# EAGLE board tes1-print (EAGLE 6.2), part 1 of 2
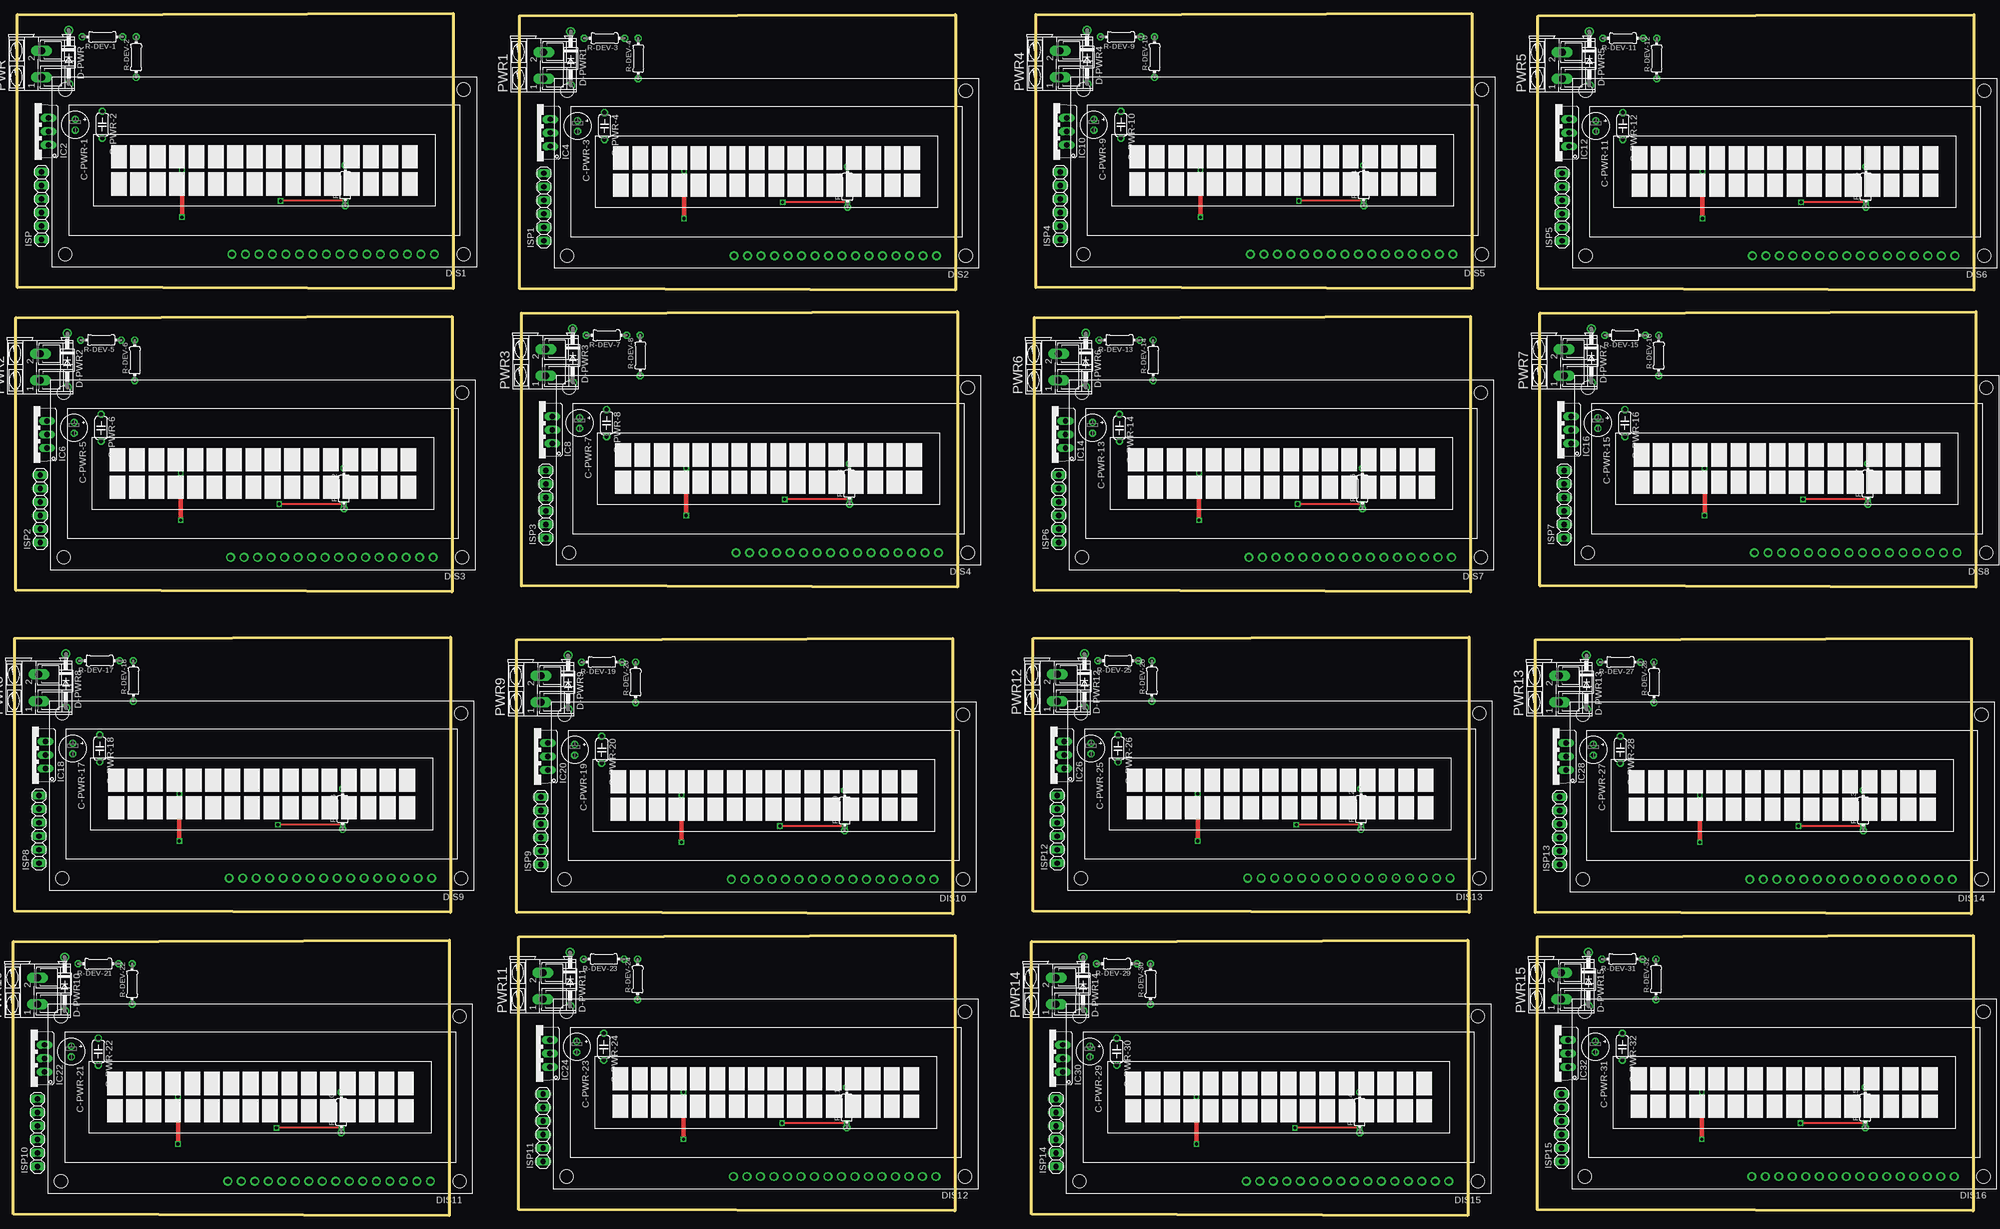
[diagram p0: board, top side]
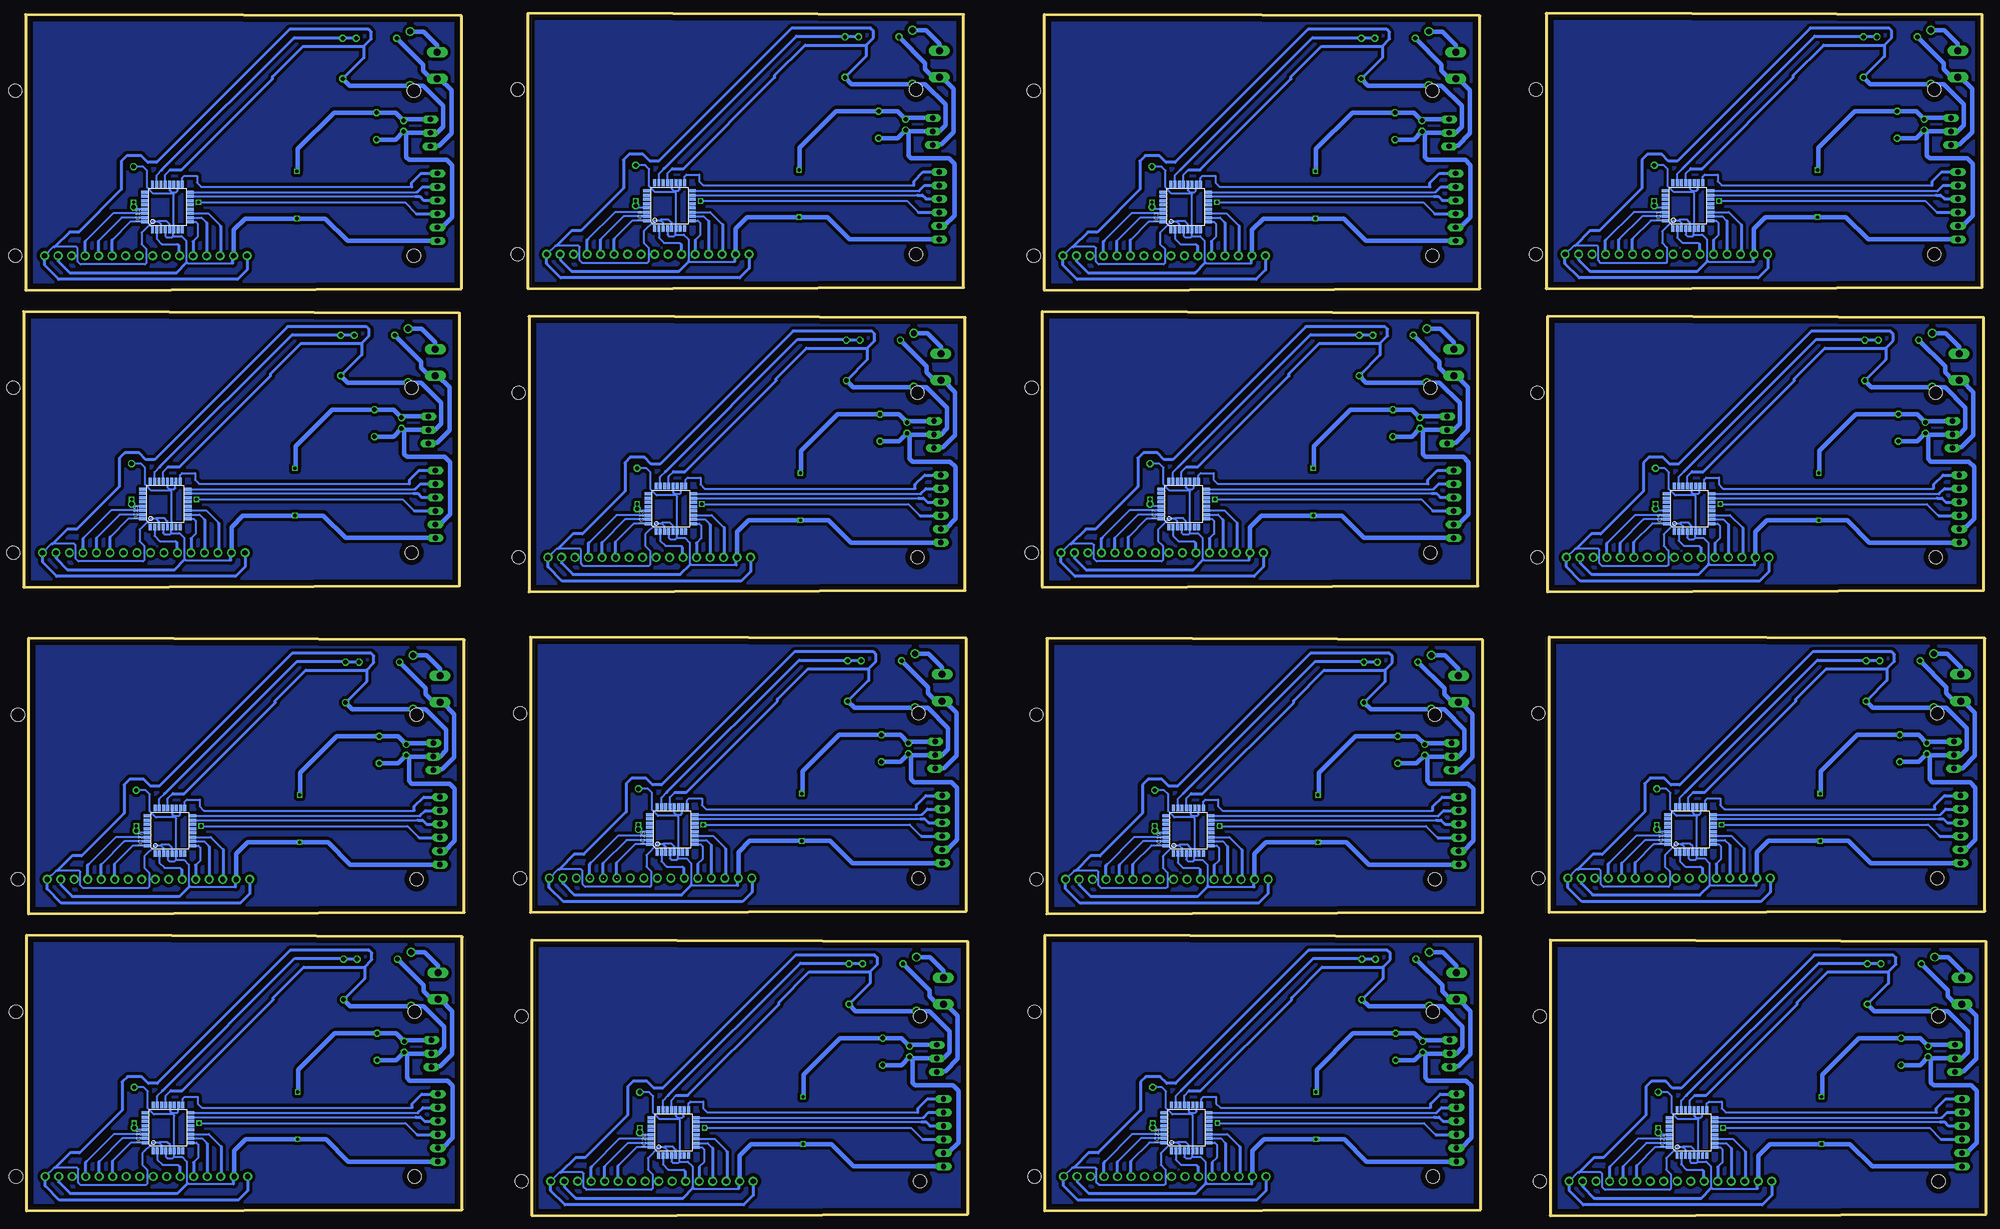
[diagram p1: board, bottom side, seen from below]

Size 369.32 x 226.19 mm. Coordinates in mm from the lower left corner, seen from the top.
Outline: 0.76,225.93 82.8,226.19 82.8,174.37 0.76,174.62 0.76,225.93
Outline: 95.25,225.68 177.29,225.93 177.29,174.12 95.25,174.37 95.25,225.68
Outline: 0.51,168.91 82.55,169.16 82.55,117.35 0.51,117.6 0.51,168.91
Outline: 95.63,169.8 177.67,170.05 177.67,118.24 95.63,118.49 95.63,169.8
Outline: 192.41,225.93 274.45,226.19 274.45,174.37 192.41,174.62 192.41,225.93
Outline: 286.89,225.68 368.94,225.93 368.94,174.12 286.89,174.37 286.89,225.68
Outline: 192.15,168.91 274.19,169.16 274.19,117.35 192.15,117.6 192.15,168.91
Outline: 287.27,169.8 369.32,170.05 369.32,118.24 287.27,118.49 287.27,169.8
Outline: 0.25,108.59 82.3,108.84 82.3,57.02 0.25,57.28 0.25,108.59
Outline: 94.74,108.33 176.78,108.59 176.78,56.77 94.74,57.02 94.74,108.33
Outline: 0,51.56 82.04,51.82 82.04,0 0,0.25 0,51.56
Outline: 95.12,52.45 177.16,52.71 177.16,0.89 95.12,1.14 95.12,52.45
Outline: 191.9,108.59 273.94,108.84 273.94,57.02 191.9,57.28 191.9,108.59
Outline: 286.38,108.33 368.43,108.59 368.43,56.77 286.38,57.02 286.38,108.33
Outline: 191.64,51.56 273.69,51.82 273.69,0 191.64,0.25 191.64,51.56
Outline: 286.77,52.45 368.81,52.71 368.81,0.89 286.77,1.14 286.77,52.45
Copper layers (1*16): Top 0.035mm / dielectric 1.5mm / Bottom 0.035mm
Design rules: minimum track width 10mil, minimum drill 24mil, track to track 8mil, track to pad 8mil, pad to pad 8mil, via to via 8mil, smd to smd 8mil, copper to edge 40mil, drill to drill 8mil, minimum pad ring 10mil, minimum via ring 8mil, stop-mask expansion 4mil, vias tented up to drill 0mil, thermal gap 10mil

## Footprints (pad centres in the part's own frame; a part is rotated, then mirrored left to right if it is on the bottom)
E2-5 = drill 0.813 pad 1.27: + -1.016,0 | drill 0.813 pad 1.27 octagon: - 1.016,0
C050-024X044 = drill 0.813 octagon: 1 -2.54,0; 2 2.54,0
DO41-10 = drill 1.118: A 5.08,0; C -5.08,0
TUXGR_16X2_R2 = drill 1 pad 1.676: 1 -32,15.5; 2 -29.46,15.5; 3 -26.92,15.5; 4 -24.38,15.5; 5 -21.84,15.5; 6 -19.3,15.5; 7 -16.76,15.5; 8 -14.22,15.5; 9 -11.68,15.5; 10 -9.14,15.5; 11 -6.6,15.5; 12 -4.06,15.5; 13 -1.52,15.5; 14 1.02,15.5; 15 3.56,15.5; 16 6.1,15.5 | hole 2.5: -37.5,-15.5; 37.5,-15.5; -37.5,15.5; 37.5,15.5
TQFP32-08 = smd 1.27 x 0.559: 1 -4.293,2.8; 2 -4.293,2; 3 -4.293,1.2; 4 -4.293,0.4; 5 -4.293,-0.4; 6 -4.293,-1.2; 7 -4.293,-2; 8 -4.293,-2.8; 17 4.293,-2.8; 18 4.293,-2; 19 4.293,-1.2; 20 4.293,-0.4; 21 4.293,0.4; 22 4.293,1.2; 23 4.293,2; 24 4.293,2.8 | smd 0.559 x 1.27: 9 -2.8,-4.293; 10 -2,-4.293; 11 -1.2,-4.293; 12 -0.4,-4.293; 13 0.4,-4.293; 14 1.2,-4.293; 15 2,-4.293; 16 2.8,-4.293; 25 2.8,4.293; 26 2,4.293; 27 1.2,4.293; 28 0.4,4.293; 29 -0.4,4.293; 30 -1.2,4.293; 31 -2,4.293; 32 -2.8,4.293
TO220V = drill 1.016 long: 1 -2.54,-2.54; 2 0,-2.54; 3 2.54,-2.54
1X06 = drill 1.016 long: 1 -6.35,0; 2 -3.81,0; 3 -1.27,0; 4 1.27,0; 5 3.81,0; 6 6.35,0
AK300/2 = drill 1.321 long: 1 -2.515,0; 2 2.489,0
0204/7 = drill 0.813 octagon: 1 -3.81,0; 2 3.81,0

## Placement (x,y rotation side)
C-PWR-1  [E2-5]  11.68,205.23 270 top
C-PWR-2  [C050-024X044]  16.76,205.23 270 top
C-PWR-3  [E2-5]  106.17,204.98 270 top
C-PWR-4  [C050-024X044]  111.25,204.98 270 top
C-PWR-5  [E2-5]  11.43,148.21 270 top
C-PWR-6  [C050-024X044]  16.51,148.21 270 top
C-PWR-7  [E2-5]  106.55,149.1 270 top
C-PWR-8  [C050-024X044]  111.63,149.1 270 top
C-PWR-9  [E2-5]  203.33,205.23 270 top
C-PWR-10  [C050-024X044]  208.41,205.23 270 top
C-PWR-11  [E2-5]  297.81,204.98 270 top
C-PWR-12  [C050-024X044]  302.89,204.98 270 top
C-PWR-13  [E2-5]  203.07,148.21 270 top
C-PWR-14  [C050-024X044]  208.15,148.21 270 top
C-PWR-15  [E2-5]  298.2,149.1 270 top
C-PWR-16  [C050-024X044]  303.28,149.1 270 top
C-PWR-17  [E2-5]  11.18,87.88 270 top
C-PWR-18  [C050-024X044]  16.26,87.88 270 top
C-PWR-19  [E2-5]  105.66,87.63 270 top
C-PWR-20  [C050-024X044]  110.74,87.63 270 top
C-PWR-21  [E2-5]  10.92,30.86 270 top
C-PWR-22  [C050-024X044]  16,30.86 270 top
C-PWR-23  [E2-5]  106.04,31.75 270 top
C-PWR-24  [C050-024X044]  111.12,31.75 270 top
C-PWR-25  [E2-5]  202.82,87.88 270 top
C-PWR-26  [C050-024X044]  207.9,87.88 270 top
C-PWR-27  [E2-5]  297.31,87.63 270 top
C-PWR-28  [C050-024X044]  302.39,87.63 270 top
C-PWR-29  [E2-5]  202.56,30.86 270 top
C-PWR-30  [C050-024X044]  207.65,30.86 270 top
C-PWR-31  [E2-5]  297.69,31.75 270 top
C-PWR-32  [C050-024X044]  302.77,31.75 270 top
D-PWR  1N4004  [DO41-10]  10.41,217.93 270 top
D-PWR1  1N4004  [DO41-10]  104.9,217.68 270 top
D-PWR2  1N4004  [DO41-10]  10.16,160.91 270 top
D-PWR3  1N4004  [DO41-10]  105.28,161.8 270 top
D-PWR4  1N4004  [DO41-10]  202.06,217.93 270 top
D-PWR5  1N4004  [DO41-10]  296.55,217.68 270 top
D-PWR6  1N4004  [DO41-10]  201.8,160.91 270 top
D-PWR7  1N4004  [DO41-10]  296.93,161.8 270 top
D-PWR8  1N4004  [DO41-10]  9.91,100.58 270 top
D-PWR9  1N4004  [DO41-10]  104.39,100.33 270 top
D-PWR10  1N4004  [DO41-10]  9.65,43.56 270 top
D-PWR11  1N4004  [DO41-10]  104.78,44.45 270 top
D-PWR12  1N4004  [DO41-10]  201.55,100.58 270 top
D-PWR13  1N4004  [DO41-10]  296.04,100.33 270 top
D-PWR14  1N4004  [DO41-10]  201.29,43.56 270 top
D-PWR15  1N4004  [DO41-10]  296.42,44.45 270 top
DIS1  TUXGR_16X2_R2  [TUXGR_16X2_R2]  47.24,196.34 180 top
DIS2  TUXGR_16X2_R2  [TUXGR_16X2_R2]  141.73,196.09 180 top
DIS3  TUXGR_16X2_R2  [TUXGR_16X2_R2]  46.99,139.32 180 top
DIS4  TUXGR_16X2_R2  [TUXGR_16X2_R2]  142.11,140.21 180 top
DIS5  TUXGR_16X2_R2  [TUXGR_16X2_R2]  238.89,196.34 180 top
DIS6  TUXGR_16X2_R2  [TUXGR_16X2_R2]  333.38,196.09 180 top
DIS7  TUXGR_16X2_R2  [TUXGR_16X2_R2]  238.63,139.32 180 top
DIS8  TUXGR_16X2_R2  [TUXGR_16X2_R2]  333.76,140.21 180 top
DIS9  TUXGR_16X2_R2  [TUXGR_16X2_R2]  46.74,78.99 180 top
DIS10  TUXGR_16X2_R2  [TUXGR_16X2_R2]  141.22,78.74 180 top
DIS11  TUXGR_16X2_R2  [TUXGR_16X2_R2]  46.48,21.97 180 top
DIS12  TUXGR_16X2_R2  [TUXGR_16X2_R2]  141.6,22.86 180 top
DIS13  TUXGR_16X2_R2  [TUXGR_16X2_R2]  238.38,78.99 180 top
DIS14  TUXGR_16X2_R2  [TUXGR_16X2_R2]  332.87,78.74 180 top
DIS15  TUXGR_16X2_R2  [TUXGR_16X2_R2]  238.12,21.97 180 top
DIS16  TUXGR_16X2_R2  [TUXGR_16X2_R2]  333.25,22.86 180 top
IC1  MEGA8-AI  [TQFP32-08]  56.13,189.99 90 bottom
IC2  7805TV  [TO220V]  4.06,203.96 90 top
IC3  MEGA8-AI  [TQFP32-08]  150.62,189.74 90 bottom
IC4  7805TV  [TO220V]  98.55,203.71 90 top
IC5  MEGA8-AI  [TQFP32-08]  55.88,132.97 90 bottom
IC6  7805TV  [TO220V]  3.81,146.94 90 top
IC7  MEGA8-AI  [TQFP32-08]  151,133.86 90 bottom
IC8  7805TV  [TO220V]  98.93,147.83 90 top
IC9  MEGA8-AI  [TQFP32-08]  247.78,189.99 90 bottom
IC10  7805TV  [TO220V]  195.71,203.96 90 top
IC11  MEGA8-AI  [TQFP32-08]  342.26,189.74 90 bottom
IC12  7805TV  [TO220V]  290.19,203.71 90 top
IC13  MEGA8-AI  [TQFP32-08]  247.52,132.97 90 bottom
IC14  7805TV  [TO220V]  195.45,146.94 90 top
IC15  MEGA8-AI  [TQFP32-08]  342.65,133.86 90 bottom
IC16  7805TV  [TO220V]  290.58,147.83 90 top
IC17  MEGA8-AI  [TQFP32-08]  55.63,72.64 90 bottom
IC18  7805TV  [TO220V]  3.56,86.61 90 top
IC19  MEGA8-AI  [TQFP32-08]  150.11,72.39 90 bottom
IC20  7805TV  [TO220V]  98.04,86.36 90 top
IC21  MEGA8-AI  [TQFP32-08]  55.37,15.62 90 bottom
IC22  7805TV  [TO220V]  3.3,29.59 90 top
IC23  MEGA8-AI  [TQFP32-08]  150.5,16.51 90 bottom
IC24  7805TV  [TO220V]  98.43,30.48 90 top
IC25  MEGA8-AI  [TQFP32-08]  247.27,72.64 90 bottom
IC26  7805TV  [TO220V]  195.2,86.61 90 top
IC27  MEGA8-AI  [TQFP32-08]  341.76,72.39 90 bottom
IC28  7805TV  [TO220V]  289.69,86.36 90 top
IC29  MEGA8-AI  [TQFP32-08]  247.01,15.62 90 bottom
IC30  7805TV  [TO220V]  194.94,29.59 90 top
IC31  MEGA8-AI  [TQFP32-08]  342.14,16.51 90 bottom
IC32  7805TV  [TO220V]  290.07,30.48 90 top
ISP  [1X06]  5.33,189.99 90 top
ISP1  [1X06]  99.82,189.74 90 top
ISP2  [1X06]  5.08,132.97 90 top
ISP3  [1X06]  100.2,133.86 90 top
ISP4  [1X06]  196.98,189.99 90 top
ISP5  [1X06]  291.46,189.74 90 top
ISP6  [1X06]  196.72,132.97 90 top
ISP7  [1X06]  291.85,133.86 90 top
ISP8  [1X06]  4.83,72.64 90 top
ISP9  [1X06]  99.31,72.39 90 top
ISP10  [1X06]  4.57,15.62 90 top
ISP11  [1X06]  99.69,16.51 90 top
ISP12  [1X06]  196.47,72.64 90 top
ISP13  [1X06]  290.96,72.39 90 top
ISP14  [1X06]  196.22,15.62 90 top
ISP15  [1X06]  291.34,16.51 90 top
PWR  [AK300/2]  5.33,216.66 90 top
PWR1  [AK300/2]  99.82,216.41 90 top
PWR2  [AK300/2]  5.08,159.64 90 top
PWR3  [AK300/2]  100.2,160.53 90 top
PWR4  [AK300/2]  196.98,216.66 90 top
PWR5  [AK300/2]  291.46,216.41 90 top
PWR6  [AK300/2]  196.72,159.64 90 top
PWR7  [AK300/2]  291.85,160.53 90 top
PWR8  [AK300/2]  4.83,99.31 90 top
PWR9  [AK300/2]  99.31,99.06 90 top
PWR10  [AK300/2]  4.57,42.29 90 top
PWR11  [AK300/2]  99.69,43.18 90 top
PWR12  [AK300/2]  196.47,99.31 90 top
PWR13  [AK300/2]  290.96,99.06 90 top
PWR14  [AK300/2]  196.22,42.29 90 top
PWR15  [AK300/2]  291.34,43.18 90 top
R-DEV-1  [0204/7]  16.76,221.74 180 top
R-DEV-2  [0204/7]  23.11,217.93 90 top
R-DEV-3  [0204/7]  111.25,221.49 180 top
R-DEV-4  [0204/7]  117.6,217.68 90 top
R-DEV-5  [0204/7]  16.51,164.72 180 top
R-DEV-6  [0204/7]  22.86,160.91 90 top
R-DEV-7  [0204/7]  111.63,165.61 180 top
R-DEV-8  [0204/7]  117.98,161.8 90 top
R-DEV-9  [0204/7]  208.41,221.74 180 top
R-DEV-10  [0204/7]  214.76,217.93 90 top
R-DEV-11  [0204/7]  302.89,221.49 180 top
R-DEV-12  [0204/7]  309.25,217.68 90 top
R-DEV-13  [0204/7]  208.15,164.72 180 top
R-DEV-14  [0204/7]  214.5,160.91 90 top
R-DEV-15  [0204/7]  303.28,165.61 180 top
R-DEV-16  [0204/7]  309.63,161.8 90 top
R-DEV-17  [0204/7]  16.26,104.39 180 top
R-DEV-18  [0204/7]  22.61,100.58 90 top
R-DEV-19  [0204/7]  110.74,104.14 180 top
R-DEV-20  [0204/7]  117.09,100.33 90 top
R-DEV-21  [0204/7]  16,47.37 180 top
R-DEV-22  [0204/7]  22.35,43.56 90 top
R-DEV-23  [0204/7]  111.12,48.26 180 top
R-DEV-24  [0204/7]  117.47,44.45 90 top
R-DEV-25  [0204/7]  207.9,104.39 180 top
R-DEV-26  [0204/7]  214.25,100.58 90 top
R-DEV-27  [0204/7]  302.39,104.14 180 top
R-DEV-28  [0204/7]  308.74,100.33 90 top
R-DEV-29  [0204/7]  207.65,47.37 180 top
R-DEV-30  [0204/7]  214,43.56 90 top
R-DEV-31  [0204/7]  302.77,48.26 180 top
R-DEV-32  [0204/7]  309.12,44.45 90 top
R-RST  [0204/7]  62.48,193.8 90 top
R-RST1  [0204/7]  156.97,193.55 90 top
R-RST2  [0204/7]  62.23,136.78 90 top
R-RST3  [0204/7]  157.35,137.67 90 top
R-RST4  [0204/7]  254.13,193.8 90 top
R-RST5  [0204/7]  348.62,193.55 90 top
R-RST6  [0204/7]  253.87,136.78 90 top
R-RST7  [0204/7]  349,137.67 90 top
R-RST8  [0204/7]  61.98,76.45 90 top
R-RST9  [0204/7]  156.46,76.2 90 top
R-RST10  [0204/7]  61.72,19.43 90 top
R-RST11  [0204/7]  156.84,20.32 90 top
R-RST12  [0204/7]  253.62,76.45 90 top
R-RST13  [0204/7]  348.11,76.2 90 top
R-RST14  [0204/7]  253.37,19.43 90 top
R-RST15  [0204/7]  348.49,20.32 90 top

## Library data of the parts
C-PWR-1-C-PWR-32 R-DEV-1-R-DEV-32 R-RST R-RST1-R-RST15 = resistor
D-PWR D-PWR1-D-PWR15 = diode
DIS1-DIS16 = display-lcd; OC_FARNELL: unknown; OC_NEWARK: unknown
IC1 IC3 IC5 IC7 IC9 IC11 IC13 IC15 IC17 IC19 IC21 IC23 IC25 IC27 IC29 IC31 = atmel; MPN: ATMEGA8-16AU; OC_FARNELL: 9171371; OC_NEWARK: 73M8863
IC2 IC4 IC6 IC8 IC10 IC12 IC14 IC16 IC18 IC20 IC22 IC24 IC26 IC28 IC30 IC32 = linear
ISP ISP1-ISP15 = pinhead
PWR PWR1-PWR15 = con-ptr500; OC_FARNELL: unknown; OC_NEWARK: unknown

## Nets
D1: DIS2.11 IC3.2
D2: DIS2.12 IC3.9
D3: DIS2.13 IC3.10
D4: DIS1.11 IC1.2
D5: DIS1.12 IC1.9
D6: DIS1.13 IC1.10
D7: DIS1.14 IC1.11
D8: DIS2.14 IC3.11
D9: DIS3.11 IC5.2
D10: DIS3.12 IC5.9
D11: DIS3.13 IC5.10
D12: DIS3.14 IC5.11
D13: DIS4.11 IC7.2
D14: DIS4.12 IC7.9
D15: DIS4.13 IC7.10
D16: DIS4.14 IC7.11
D17: DIS5.11 IC9.2
D18: DIS5.12 IC9.9
D19: DIS5.13 IC9.10
D20: DIS5.14 IC9.11
D21: DIS6.11 IC11.2
D22: DIS6.12 IC11.9
D23: DIS6.13 IC11.10
D24: DIS6.14 IC11.11
D25: DIS7.11 IC13.2
D26: DIS7.12 IC13.9
D27: DIS7.13 IC13.10
D28: DIS7.14 IC13.11
D29: DIS8.11 IC15.2
D30: DIS8.12 IC15.9
D31: DIS8.13 IC15.10
D32: DIS8.14 IC15.11
D33: DIS9.11 IC17.2
D34: DIS9.12 IC17.9
D35: DIS9.13 IC17.10
D36: DIS9.14 IC17.11
D37: DIS10.11 IC19.2
D38: DIS10.12 IC19.9
D39: DIS10.13 IC19.10
D40: DIS10.14 IC19.11
D41: DIS11.11 IC21.2
D42: DIS11.12 IC21.9
D43: DIS11.13 IC21.10
D44: DIS11.14 IC21.11
D45: DIS12.11 IC23.2
D46: DIS12.12 IC23.9
D47: DIS12.13 IC23.10
D48: DIS12.14 IC23.11
D49: DIS13.11 IC25.2
D50: DIS13.12 IC25.9
D51: DIS13.13 IC25.10
D52: DIS13.14 IC25.11
D53: DIS14.11 IC27.2
D54: DIS14.12 IC27.9
D55: DIS14.13 IC27.10
D56: DIS14.14 IC27.11
D57: DIS15.11 IC29.2
D58: DIS15.12 IC29.9
D59: DIS15.13 IC29.10
D60: DIS15.14 IC29.11
D61: DIS16.11 IC31.2
D62: DIS16.12 IC31.9
D63: DIS16.13 IC31.10
D64: DIS16.14 IC31.11
EN: DIS1.6 IC1.32
EN1: DIS2.6 IC3.32
EN2: DIS3.6 IC5.32
EN3: DIS4.6 IC7.32
EN4: DIS5.6 IC9.32
EN5: DIS6.6 IC11.32
EN6: DIS7.6 IC13.32
EN7: DIS8.6 IC15.32
EN8: DIS9.6 IC17.32
EN9: DIS10.6 IC19.32
EN10: DIS11.6 IC21.32
EN11: DIS12.6 IC23.32
EN12: DIS13.6 IC25.32
EN13: DIS14.6 IC27.32
EN14: DIS15.6 IC29.32
EN15: DIS16.6 IC31.32
GND: C-PWR-1.- C-PWR-2.2 D-PWR.A DIS1.1 DIS1.16 IC1.3 IC1.5 IC1.21 IC2.2 ISP.2 R-DEV-2.1
GND1: C-PWR-3.- C-PWR-4.2 D-PWR1.A DIS2.1 DIS2.16 IC3.3 IC3.5 IC3.21 IC4.2 ISP1.2 R-DEV-4.1
GND2: C-PWR-5.- C-PWR-6.2 D-PWR2.A DIS3.1 DIS3.16 IC5.3 IC5.5 IC5.21 IC6.2 ISP2.2 R-DEV-6.1
GND3: C-PWR-7.- C-PWR-8.2 D-PWR3.A DIS4.1 DIS4.16 IC7.3 IC7.5 IC7.21 IC8.2 ISP3.2 R-DEV-8.1
GND4: C-PWR-9.- C-PWR-10.2 D-PWR4.A DIS5.1 DIS5.16 IC9.3 IC9.5 IC9.21 IC10.2 ISP4.2 R-DEV-10.1
GND5: C-PWR-11.- C-PWR-12.2 D-PWR5.A DIS6.1 DIS6.16 IC11.3 IC11.5 IC11.21 IC12.2 ISP5.2 R-DEV-12.1
GND6: C-PWR-13.- C-PWR-14.2 D-PWR6.A DIS7.1 DIS7.16 IC13.3 IC13.5 IC13.21 IC14.2 ISP6.2 R-DEV-14.1
GND7: C-PWR-15.- C-PWR-16.2 D-PWR7.A DIS8.1 DIS8.16 IC15.3 IC15.5 IC15.21 IC16.2 ISP7.2 R-DEV-16.1
GND8: C-PWR-17.- C-PWR-18.2 D-PWR8.A DIS9.1 DIS9.16 IC17.3 IC17.5 IC17.21 IC18.2 ISP8.2 R-DEV-18.1
GND9: C-PWR-19.- C-PWR-20.2 D-PWR9.A DIS10.1 DIS10.16 IC19.3 IC19.5 IC19.21 IC20.2 ISP9.2 R-DEV-20.1
GND10: C-PWR-21.- C-PWR-22.2 D-PWR10.A DIS11.1 DIS11.16 IC21.3 IC21.5 IC21.21 IC22.2 ISP10.2 R-DEV-22.1
GND11: C-PWR-23.- C-PWR-24.2 D-PWR11.A DIS12.1 DIS12.16 IC23.3 IC23.5 IC23.21 IC24.2 ISP11.2 R-DEV-24.1
GND12: C-PWR-25.- C-PWR-26.2 D-PWR12.A DIS13.1 DIS13.16 IC25.3 IC25.5 IC25.21 IC26.2 ISP12.2 R-DEV-26.1
GND13: C-PWR-27.- C-PWR-28.2 D-PWR13.A DIS14.1 DIS14.16 IC27.3 IC27.5 IC27.21 IC28.2 ISP13.2 R-DEV-28.1
GND14: C-PWR-29.- C-PWR-30.2 D-PWR14.A DIS15.1 DIS15.16 IC29.3 IC29.5 IC29.21 IC30.2 ISP14.2 R-DEV-30.1
GND15: C-PWR-31.- C-PWR-32.2 D-PWR15.A DIS16.1 DIS16.16 IC31.3 IC31.5 IC31.21 IC32.2 ISP15.2 R-DEV-32.1
IN: IC1.23 R-DEV-1.1 R-DEV-2.2
IN1: IC3.23 R-DEV-3.1 R-DEV-4.2
IN2: IC5.23 R-DEV-5.1 R-DEV-6.2
IN3: IC7.23 R-DEV-7.1 R-DEV-8.2
IN4: IC9.23 R-DEV-9.1 R-DEV-10.2
IN5: IC11.23 R-DEV-11.1 R-DEV-12.2
IN6: IC13.23 R-DEV-13.1 R-DEV-14.2
IN7: IC15.23 R-DEV-15.1 R-DEV-16.2
IN8: IC17.23 R-DEV-17.1 R-DEV-18.2
IN9: IC19.23 R-DEV-19.1 R-DEV-20.2
IN10: IC21.23 R-DEV-21.1 R-DEV-22.2
IN11: IC23.23 R-DEV-23.1 R-DEV-24.2
IN12: IC25.23 R-DEV-25.1 R-DEV-26.2
IN13: IC27.23 R-DEV-27.1 R-DEV-28.2
IN14: IC29.23 R-DEV-29.1 R-DEV-30.2
IN15: IC31.23 R-DEV-31.1 R-DEV-32.2
N$2: IC3.17 ISP1.6
N$3: IC3.16 ISP1.5
N$4: IC3.15 ISP1.4
N$6: IC5.17 ISP2.6
N$7: IC5.16 ISP2.5
N$8: IC5.15 ISP2.4
N$10: IC7.17 ISP3.6
N$11: IC7.16 ISP3.5
N$12: IC7.15 ISP3.4
N$14: IC9.17 ISP4.6
N$15: IC1.17 ISP.6
N$16: IC1.16 ISP.5
N$17: IC1.15 ISP.4
N$18: IC9.16 ISP4.5
N$19: IC9.15 ISP4.4
N$21: IC11.17 ISP5.6
N$22: IC11.16 ISP5.5
N$23: IC11.15 ISP5.4
N$25: IC13.17 ISP6.6
N$26: IC13.16 ISP6.5
N$27: IC13.15 ISP6.4
N$29: IC15.17 ISP7.6
N$30: IC15.16 ISP7.5
N$31: IC15.15 ISP7.4
N$33: IC17.17 ISP8.6
N$34: IC17.16 ISP8.5
N$35: IC17.15 ISP8.4
N$37: IC19.17 ISP9.6
N$38: IC19.16 ISP9.5
N$39: IC19.15 ISP9.4
N$41: IC21.17 ISP10.6
N$42: IC21.16 ISP10.5
N$43: IC21.15 ISP10.4
N$45: IC23.17 ISP11.6
N$46: IC23.16 ISP11.5
N$47: IC23.15 ISP11.4
N$49: IC25.17 ISP12.6
N$50: IC25.16 ISP12.5
N$51: IC25.15 ISP12.4
N$53: IC27.17 ISP13.6
N$54: IC27.16 ISP13.5
N$55: IC27.15 ISP13.4
N$57: IC29.17 ISP14.6
N$58: IC29.16 ISP14.5
N$59: IC29.15 ISP14.4
N$61: IC31.17 ISP15.6
N$62: IC31.16 ISP15.5
N$63: IC31.15 ISP15.4
RS: DIS1.4 IC1.30
RS1: DIS2.4 IC3.30
RS2: DIS3.4 IC5.30
RS3: DIS4.4 IC7.30
RS4: DIS5.4 IC9.30
RS5: DIS6.4 IC11.30
RS6: DIS7.4 IC13.30
RS7: DIS8.4 IC15.30
RS8: DIS9.4 IC17.30
RS9: DIS10.4 IC19.30
RS10: DIS11.4 IC21.30
RS11: DIS12.4 IC23.30
RS12: DIS13.4 IC25.30
RS13: DIS14.4 IC27.30
RS14: DIS15.4 IC29.30
RS15: DIS16.4 IC31.30
RST: IC1.29 ISP.3 R-RST.1
RST1: IC3.29 ISP1.3 R-RST1.1
RST2: IC5.29 ISP2.3 R-RST2.1
RST3: IC7.29 ISP3.3 R-RST3.1
RST4: IC9.29 ISP4.3 R-RST4.1
RST5: IC11.29 ISP5.3 R-RST5.1
RST6: IC13.29 ISP6.3 R-RST6.1
RST7: IC15.29 ISP7.3 R-RST7.1
RST8: IC17.29 ISP8.3 R-RST8.1
RST9: IC19.29 ISP9.3 R-RST9.1
RST10: IC21.29 ISP10.3 R-RST10.1
RST11: IC23.29 ISP11.3 R-RST11.1
RST12: IC25.29 ISP12.3 R-RST12.1
RST13: IC27.29 ISP13.3 R-RST13.1
RST14: IC29.29 ISP14.3 R-RST14.1
RST15: IC31.29 ISP15.3 R-RST15.1
RW: DIS1.5 IC1.31
RW1: DIS2.5 IC3.31
RW2: DIS3.5 IC5.31
RW3: DIS4.5 IC7.31
RW4: DIS5.5 IC9.31
RW5: DIS6.5 IC11.31
RW6: DIS7.5 IC13.31
RW7: DIS8.5 IC15.31
RW8: DIS9.5 IC17.31
RW9: DIS10.5 IC19.31
RW10: DIS11.5 IC21.31
RW11: DIS12.5 IC23.31
RW12: DIS13.5 IC25.31
RW13: DIS14.5 IC27.31
RW14: DIS15.5 IC29.31
RW15: DIS16.5 IC31.31
V0: D-PWR.C PWR.2
V1: D-PWR1.C PWR1.2
V2: IC4.1 PWR1.1 R-DEV-3.2
V3: D-PWR2.C PWR2.2
V4: IC6.1 PWR2.1 R-DEV-5.2
V5: D-PWR3.C PWR3.2
V6: IC8.1 PWR3.1 R-DEV-7.2
V7: D-PWR4.C PWR4.2
V8: IC10.1 PWR4.1 R-DEV-9.2
V9: D-PWR5.C PWR5.2
V10: IC12.1 PWR5.1 R-DEV-11.2
V11: D-PWR6.C PWR6.2
V12: IC2.1 PWR.1 R-DEV-1.2
V13: IC14.1 PWR6.1 R-DEV-13.2
V14: D-PWR7.C PWR7.2
V15: IC16.1 PWR7.1 R-DEV-15.2
V16: D-PWR8.C PWR8.2
V17: IC18.1 PWR8.1 R-DEV-17.2
V18: D-PWR9.C PWR9.2
V19: IC20.1 PWR9.1 R-DEV-19.2
V20: D-PWR10.C PWR10.2
V21: IC22.1 PWR10.1 R-DEV-21.2
V22: D-PWR11.C PWR11.2
V23: IC24.1 PWR11.1 R-DEV-23.2
V24: D-PWR12.C PWR12.2
V25: IC26.1 PWR12.1 R-DEV-25.2
V26: D-PWR13.C PWR13.2
V27: IC28.1 PWR13.1 R-DEV-27.2
V28: D-PWR14.C PWR14.2
V29: IC30.1 PWR14.1 R-DEV-29.2
V30: D-PWR15.C PWR15.2
V31: IC32.1 PWR15.1 R-DEV-31.2
VCC: C-PWR-1.+ C-PWR-2.1 DIS1.2 DIS1.15 IC1.4 IC1.6 IC1.18 IC1.20 IC2.3 ISP.1 R-RST.2
VCC1: C-PWR-3.+ C-PWR-4.1 DIS2.2 DIS2.15 IC3.4 IC3.6 IC3.18 IC3.20 IC4.3 ISP1.1 R-RST1.2
VCC2: C-PWR-5.+ C-PWR-6.1 DIS3.2 DIS3.15 IC5.4 IC5.6 IC5.18 IC5.20 IC6.3 ISP2.1 R-RST2.2
VCC3: C-PWR-7.+ C-PWR-8.1 DIS4.2 DIS4.15 IC7.4 IC7.6 IC7.18 IC7.20 IC8.3 ISP3.1 R-RST3.2
VCC4: C-PWR-9.+ C-PWR-10.1 DIS5.2 DIS5.15 IC9.4 IC9.6 IC9.18 IC9.20 IC10.3 ISP4.1 R-RST4.2
VCC5: C-PWR-11.+ C-PWR-12.1 DIS6.2 DIS6.15 IC11.4 IC11.6 IC11.18 IC11.20 IC12.3 ISP5.1 R-RST5.2
VCC6: C-PWR-13.+ C-PWR-14.1 DIS7.2 DIS7.15 IC13.4 IC13.6 IC13.18 IC13.20 IC14.3 ISP6.1 R-RST6.2
VCC7: C-PWR-15.+ C-PWR-16.1 DIS8.2 DIS8.15 IC15.4 IC15.6 IC15.18 IC15.20 IC16.3 ISP7.1 R-RST7.2
VCC8: C-PWR-17.+ C-PWR-18.1 DIS9.2 DIS9.15 IC17.4 IC17.6 IC17.18 IC17.20 IC18.3 ISP8.1 R-RST8.2
VCC9: C-PWR-19.+ C-PWR-20.1 DIS10.2 DIS10.15 IC19.4 IC19.6 IC19.18 IC19.20 IC20.3 ISP9.1 R-RST9.2
VCC10: C-PWR-21.+ C-PWR-22.1 DIS11.2 DIS11.15 IC21.4 IC21.6 IC21.18 IC21.20 IC22.3 ISP10.1 R-RST10.2
VCC11: C-PWR-23.+ C-PWR-24.1 DIS12.2 DIS12.15 IC23.4 IC23.6 IC23.18 IC23.20 IC24.3 ISP11.1 R-RST11.2
VCC12: C-PWR-25.+ C-PWR-26.1 DIS13.2 DIS13.15 IC25.4 IC25.6 IC25.18 IC25.20 IC26.3 ISP12.1 R-RST12.2
VCC13: C-PWR-27.+ C-PWR-28.1 DIS14.2 DIS14.15 IC27.4 IC27.6 IC27.18 IC27.20 IC28.3 ISP13.1 R-RST13.2
VCC14: C-PWR-29.+ C-PWR-30.1 DIS15.2 DIS15.15 IC29.4 IC29.6 IC29.18 IC29.20 IC30.3 ISP14.1 R-RST14.2
VCC15: C-PWR-31.+ C-PWR-32.1 DIS16.2 DIS16.15 IC31.4 IC31.6 IC31.18 IC31.20 IC32.3 ISP15.1 R-RST15.2

## Tracks (layer width: path | path; a pad name or v marks a point on that pad's centre or on a via)
D1
  Bottom 0.406: IC3.2 152.62,183.74 151.64,182.75 148.72,182.75 148.46,182.5
  Bottom 0.61: 148.46,182.5 148.46,180.72 DIS2.11
D2
  Bottom 0.406: IC3.9 145.28,186.94 144.91,186.56 144.91,184.15 145.8,183.26
  Bottom 0.61: 145.8,183.26 DIS2.12
D3
  Bottom 0.406: IC3.10 144.18,187.74 143.26,186.82
  Bottom 0.61: 143.26,186.82 DIS2.13
D4
  Bottom 0.406: IC1.2 58.13,183.99 57.15,183.01 54.23,183.01 53.97,182.75
  Bottom 0.61: 53.97,182.75 53.97,180.97 DIS1.11
D5
  Bottom 0.406: IC1.9 50.79,187.19 50.42,186.82 50.42,184.4 51.31,183.52
  Bottom 0.61: 51.31,183.52 DIS1.12
D6
  Bottom 0.406: IC1.10 49.69,187.99 48.77,187.07
  Bottom 0.61: 48.77,187.07 DIS1.13
D7
  Bottom 0.406: IC1.11 48.46,188.79 46.1,186.44
  Bottom 0.61: 46.1,186.44 46.1,180.97 DIS1.14
D8
  Bottom 0.406: IC3.11 142.94,188.54 140.59,186.18
  Bottom 0.61: 140.59,186.18 140.59,180.71 DIS2.14
D9
  Bottom 0.406: IC5.2 57.88,126.97 56.9,125.98 53.97,125.98 53.72,125.73
  Bottom 0.61: 53.72,125.73 53.72,123.95 DIS3.11
D10
  Bottom 0.406: IC5.9 50.54,130.17 50.17,129.79 50.17,127.38 51.05,126.49
  Bottom 0.61: 51.05,126.49 DIS3.12
D11
  Bottom 0.406: IC5.10 49.44,130.97 48.51,130.05
  Bottom 0.61: 48.51,130.05 DIS3.13
D12
  Bottom 0.406: IC5.11 48.2,131.77 45.85,129.41
  Bottom 0.61: 45.85,129.41 45.85,123.94 DIS3.14
D13
  Bottom 0.406: IC7.2 153,127.86 152.02,126.87 149.1,126.87 148.84,126.62
  Bottom 0.61: 148.84,126.62 148.84,124.84 DIS4.11
D14
  Bottom 0.406: IC7.9 145.66,131.06 145.29,130.68 145.29,128.27 146.18,127.38
  Bottom 0.61: 146.18,127.38 DIS4.12
D15
  Bottom 0.406: IC7.10 144.56,131.86 143.64,130.94
  Bottom 0.61: 143.64,130.94 DIS4.13
D16
  Bottom 0.406: IC7.11 143.33,132.66 140.97,130.3
  Bottom 0.61: 140.97,130.3 140.97,124.83 DIS4.14
D17
  Bottom 0.406: IC9.2 249.78,183.99 248.79,183.01 245.87,183.01 245.62,182.75
  Bottom 0.61: 245.62,182.75 245.62,180.97 DIS5.11
D18
  Bottom 0.406: IC9.9 242.44,187.19 242.06,186.82 242.06,184.4 242.95,183.52
  Bottom 0.61: 242.95,183.52 DIS5.12
D19
  Bottom 0.406: IC9.10 241.33,187.99 240.41,187.07
  Bottom 0.61: 240.41,187.07 DIS5.13
D20
  Bottom 0.406: IC9.11 240.1,188.79 237.74,186.44
  Bottom 0.61: 237.74,186.44 237.74,180.97 DIS5.14
D21
  Bottom 0.406: IC11.2 344.26,183.74 343.28,182.75 340.36,182.75 340.11,182.5
  Bottom 0.61: 340.11,182.5 340.11,180.72 DIS6.11
D22
  Bottom 0.406: IC11.9 336.93,186.94 336.55,186.56 336.55,184.15 337.44,183.26
  Bottom 0.61: 337.44,183.26 DIS6.12
D23
  Bottom 0.406: IC11.10 335.82,187.74 334.9,186.82
  Bottom 0.61: 334.9,186.82 DIS6.13
D24
  Bottom 0.406: IC11.11 334.59,188.54 332.23,186.18
  Bottom 0.61: 332.23,186.18 332.23,180.71 DIS6.14
D25
  Bottom 0.406: IC13.2 249.52,126.97 248.54,125.98 245.62,125.98 245.36,125.73
  Bottom 0.61: 245.36,125.73 245.36,123.95 DIS7.11
D26
  Bottom 0.406: IC13.9 242.18,130.17 241.81,129.79 241.81,127.38 242.7,126.49
  Bottom 0.61: 242.7,126.49 DIS7.12
D27
  Bottom 0.406: IC13.10 241.08,130.97 240.16,130.05
  Bottom 0.61: 240.16,130.05 DIS7.13
D28
  Bottom 0.406: IC13.11 239.85,131.77 237.49,129.41
  Bottom 0.61: 237.49,129.41 237.49,123.94 DIS7.14
D29
  Bottom 0.406: IC15.2 344.65,127.86 343.66,126.87 340.74,126.87 340.49,126.62
  Bottom 0.61: 340.49,126.62 340.49,124.84 DIS8.11
D30
  Bottom 0.406: IC15.9 337.31,131.06 336.93,130.68 336.93,128.27 337.82,127.38
  Bottom 0.61: 337.82,127.38 DIS8.12
D31
  Bottom 0.406: IC15.10 336.2,131.86 335.28,130.94
  Bottom 0.61: 335.28,130.94 DIS8.13
D32
  Bottom 0.406: IC15.11 334.97,132.66 332.61,130.3
  Bottom 0.61: 332.61,130.3 332.61,124.83 DIS8.14
D33
  Bottom 0.406: IC17.2 57.63,66.64 56.64,65.66 53.72,65.66 53.47,65.41
  Bottom 0.61: 53.47,65.41 53.47,63.63 DIS9.11
D34
  Bottom 0.406: IC17.9 50.29,69.84 49.91,69.47 49.91,67.06 50.8,66.17
  Bottom 0.61: 50.8,66.17 DIS9.12
D35
  Bottom 0.406: IC17.10 49.18,70.64 48.26,69.72
  Bottom 0.61: 48.26,69.72 DIS9.13
D36
  Bottom 0.406: IC17.11 47.95,71.44 45.59,69.09
  Bottom 0.61: 45.59,69.09 45.59,63.62 DIS9.14
D37
  Bottom 0.406: IC19.2 152.11,66.39 151.13,65.41 148.21,65.41 147.96,65.15
  Bottom 0.61: 147.96,65.15 147.96,63.37 DIS10.11
D38
  Bottom 0.406: IC19.9 144.77,69.59 144.4,69.22 144.4,66.8 145.29,65.91
  Bottom 0.61: 145.29,65.91 DIS10.12
D39
  Bottom 0.406: IC19.10 143.67,70.39 142.75,69.47
  Bottom 0.61: 142.75,69.47 DIS10.13
D40
  Bottom 0.406: IC19.11 142.44,71.19 140.08,68.83
  Bottom 0.61: 140.08,68.83 140.08,63.36 DIS10.14
D41
  Bottom 0.406: IC21.2 57.37,9.62 56.39,8.64 53.47,8.64 53.21,8.38
  Bottom 0.61: 53.21,8.38 53.21,6.6 DIS11.11
D42
  Bottom 0.406: IC21.9 50.03,12.82 49.66,12.45 49.66,10.03 50.55,9.14
  Bottom 0.61: 50.55,9.14 DIS11.12
D43
  Bottom 0.406: IC21.10 48.93,13.62 48.01,12.7
  Bottom 0.61: 48.01,12.7 DIS11.13
D44
  Bottom 0.406: IC21.11 47.7,14.42 45.34,12.06
  Bottom 0.61: 45.34,12.06 45.34,6.59 DIS11.14
D45
  Bottom 0.406: IC23.2 152.5,10.51 151.51,9.53 148.59,9.53 148.34,9.27
  Bottom 0.61: 148.34,9.27 148.34,7.49 DIS12.11
D46
  Bottom 0.406: IC23.9 145.16,13.71 144.78,13.34 144.78,10.92 145.67,10.03
  Bottom 0.61: 145.67,10.03 DIS12.12
D47
  Bottom 0.406: IC23.10 144.05,14.51 143.13,13.59
  Bottom 0.61: 143.13,13.59 DIS12.13
D48
  Bottom 0.406: IC23.11 142.82,15.31 140.46,12.95
  Bottom 0.61: 140.46,12.95 140.46,7.48 DIS12.14
D49
  Bottom 0.406: IC25.2 249.27,66.64 248.29,65.66 245.36,65.66 245.11,65.41
  Bottom 0.61: 245.11,65.41 245.11,63.63 DIS13.11
D50
  Bottom 0.406: IC25.9 241.93,69.84 241.55,69.47 241.55,67.06 242.44,66.17
  Bottom 0.61: 242.44,66.17 DIS13.12
D51
  Bottom 0.406: IC25.10 240.82,70.64 239.9,69.72
  Bottom 0.61: 239.9,69.72 DIS13.13
D52
  Bottom 0.406: IC25.11 239.59,71.44 237.24,69.09
  Bottom 0.61: 237.24,69.09 237.24,63.62 DIS13.14
D53
  Bottom 0.406: IC27.2 343.76,66.39 342.77,65.41 339.85,65.41 339.6,65.15
  Bottom 0.61: 339.6,65.15 339.6,63.37 DIS14.11
D54
  Bottom 0.406: IC27.9 336.42,69.59 336.04,69.22 336.04,66.8 336.93,65.91
  Bottom 0.61: 336.93,65.91 DIS14.12
D55
  Bottom 0.406: IC27.10 335.31,70.39 334.39,69.47
  Bottom 0.61: 334.39,69.47 DIS14.13
D56
  Bottom 0.406: IC27.11 334.08,71.19 331.72,68.83
  Bottom 0.61: 331.72,68.83 331.72,63.36 DIS14.14
D57
  Bottom 0.406: IC29.2 249.01,9.62 248.03,8.64 245.11,8.64 244.86,8.38
  Bottom 0.61: 244.86,8.38 244.86,6.6 DIS15.11
D58
  Bottom 0.406: IC29.9 241.68,12.82 241.3,12.45 241.3,10.03 242.19,9.14
  Bottom 0.61: 242.19,9.14 DIS15.12
D59
  Bottom 0.406: IC29.10 240.57,13.62 239.65,12.7
  Bottom 0.61: 239.65,12.7 DIS15.13
D60
  Bottom 0.406: IC29.11 239.34,14.42 236.98,12.06
  Bottom 0.61: 236.98,12.06 236.98,6.59 DIS15.14
D61
  Bottom 0.406: IC31.2 344.14,10.51 343.15,9.53 340.23,9.53 339.98,9.27
  Bottom 0.61: 339.98,9.27 339.98,7.49 DIS16.11
D62
  Bottom 0.406: IC31.9 336.8,13.71 336.42,13.34 336.42,10.92 337.31,10.03
  Bottom 0.61: 337.31,10.03 DIS16.12
D63
  Bottom 0.406: IC31.10 335.69,14.51 334.77,13.59
  Bottom 0.61: 334.77,13.59 DIS16.13
D64
  Bottom 0.406: IC31.11 334.46,15.31 332.11,12.95
  Bottom 0.61: 332.11,12.95 332.11,7.48 DIS16.14
EN  (1 unrouted)
  Bottom 0.406: IC1.32 63.12,187.19 66.55,183.77
  Bottom 0.61: DIS1.6 66.55,183.77
EN1  (1 unrouted)
  Bottom 0.406: IC3.32 157.61,186.94 161.04,183.52
  Bottom 0.61: DIS2.6 161.04,183.52
EN2  (1 unrouted)
  Bottom 0.406: IC5.32 62.87,130.17 66.29,126.75
  Bottom 0.61: DIS3.6 66.29,126.75
EN3  (1 unrouted)
  Bottom 0.406: IC7.32 157.99,131.06 161.42,127.64
  Bottom 0.61: DIS4.6 161.42,127.64
EN4  (1 unrouted)
  Bottom 0.406: IC9.32 254.77,187.19 258.19,183.77
  Bottom 0.61: DIS5.6 258.19,183.77
EN5  (1 unrouted)
  Bottom 0.406: IC11.32 349.26,186.94 352.68,183.52
  Bottom 0.61: DIS6.6 352.68,183.52
EN6  (1 unrouted)
  Bottom 0.406: IC13.32 254.51,130.17 257.94,126.75
  Bottom 0.61: DIS7.6 257.94,126.75
EN7  (1 unrouted)
  Bottom 0.406: IC15.32 349.64,131.06 353.06,127.64
  Bottom 0.61: DIS8.6 353.06,127.64
EN8  (1 unrouted)
  Bottom 0.406: IC17.32 62.62,69.84 66.04,66.42
  Bottom 0.61: DIS9.6 66.04,66.42
EN9  (1 unrouted)
  Bottom 0.406: IC19.32 157.1,69.59 160.53,66.17
  Bottom 0.61: DIS10.6 160.53,66.17
EN10  (1 unrouted)
  Bottom 0.406: IC21.32 62.36,12.82 65.79,9.4
  Bottom 0.61: DIS11.6 65.79,9.4
EN11  (1 unrouted)
  Bottom 0.406: IC23.32 157.49,13.71 160.91,10.29
  Bottom 0.61: DIS12.6 160.91,10.29
EN12  (1 unrouted)
  Bottom 0.406: IC25.32 254.26,69.84 257.68,66.42
  Bottom 0.61: DIS13.6 257.68,66.42
EN13  (1 unrouted)
  Bottom 0.406: IC27.32 348.75,69.59 352.17,66.17
  Bottom 0.61: DIS14.6 352.17,66.17
EN14  (1 unrouted)
  Bottom 0.406: IC29.32 254.01,12.82 257.43,9.4
  Bottom 0.61: DIS15.6 257.43,9.4
EN15  (1 unrouted)
  Bottom 0.406: IC31.32 349.13,13.71 352.55,10.29
  Bottom 0.61: DIS16.6 352.55,10.29
GND
  Bottom 0.406: 79.12,178.94 79.25,179.07 | IC1.3 57.33,186.75 57.78,187.2 57.91,187.2 | 57.91,187.2 58.93,187.2 60.96,185.17 60.96,183.01 60.07,182.12 60.07,179.45 60.33,179.2 72.52,179.2 73.03,179.71 73.03,182.25 73.28,182.5 77.34,182.5 77.59,182.5 DIS1.1 | IC1.5 55.73,186.8 56.26,187.33 57.78,187.33 57.91,187.2 | IC1.21 56.53,196.07 55.63,196.98
  Bottom 0.61: DIS1.1 79.25,179.07 76.58,176.4 42.93,176.4 41.14,178.19 DIS1.16 | 55.63,196.98 53.47,196.98 36.32,214.12 36.32,214.5 30.61,220.22 19.18,220.22 | 19.18,220.22 17.78,221.62 17.78,222.88 18.29,223.39 33.15,223.39 58.17,198.37 59.82,198.37 61.09,199.64 63.75,199.64 64.77,198.63 64.77,193.29 72.77,185.29 74.55,185.29 77.34,182.5 | 19.18,220.22 19.18,218.06 R-DEV-2.1
  Bottom 0.813: R-DEV-2.1 21.84,212.85 D-PWR.A 8,212.85 4.19,209.04 4.19,205.11 5.33,203.96 IC2.2 11.43,203.96 C-PWR-1.- | C-PWR-2.2 13.21,202.69 C-PWR-1.- | ISP.2 4.45,186.18 2.54,188.09 2.54,197.87 3.56,198.88 10.67,198.88 11.18,199.39 11.18,203.71 C-PWR-1.-
GND1
  Bottom 0.406: 173.61,178.69 173.74,178.82 | IC3.3 151.82,186.49 152.27,186.94 152.4,186.94 | 152.4,186.94 153.42,186.94 155.45,184.91 155.45,182.75 154.56,181.86 154.56,179.2 154.81,178.94 167,178.94 167.51,179.45 167.51,181.99 167.77,182.25 171.83,182.25 172.07,182.25 DIS2.1 | IC3.5 150.22,186.54 150.75,187.07 152.27,187.07 152.4,186.94 | IC3.21 151.02,195.81 150.11,196.72
  Bottom 0.61: DIS2.1 173.74,178.82 171.07,176.15 137.41,176.15 135.63,177.93 DIS2.16 | 150.11,196.72 147.96,196.72 130.81,213.87 130.81,214.25 125.09,219.96 113.66,219.96 | 113.66,219.96 112.27,221.36 112.27,222.63 112.78,223.14 127.63,223.14 152.65,198.12 154.31,198.12 155.57,199.39 158.24,199.39 159.26,198.37 159.26,193.04 167.26,185.04 169.04,185.04 171.83,182.25 | 113.66,219.96 113.66,217.81 R-DEV-4.1
  Bottom 0.813: R-DEV-4.1 116.33,212.6 D-PWR1.A 102.49,212.6 98.68,208.79 98.68,204.85 99.82,203.71 IC4.2 105.92,203.71 C-PWR-3.- | C-PWR-4.2 107.7,202.44 C-PWR-3.- | ISP1.2 98.93,185.93 97.03,187.83 97.03,197.61 98.04,198.63 105.16,198.63 105.66,199.14 105.66,203.45 C-PWR-3.-
GND2
  Bottom 0.406: 78.87,121.92 78.99,122.05 | IC5.3 57.08,129.72 57.53,130.18 57.66,130.18 | 57.66,130.18 58.67,130.18 60.71,128.14 60.71,125.98 59.82,125.1 59.82,122.43 60.07,122.17 72.26,122.17 72.77,122.68 72.77,125.22 73.03,125.48 77.09,125.48 77.33,125.48 DIS3.1 | IC5.5 55.48,129.78 56.01,130.3 57.53,130.3 57.66,130.18 | IC5.21 56.28,139.05 55.37,139.95
  Bottom 0.61: DIS3.1 78.99,122.05 76.33,119.38 42.67,119.38 40.89,121.16 DIS3.16 | 55.37,139.95 53.21,139.95 36.07,157.1 36.07,157.48 30.35,163.2 18.92,163.2 | 18.92,163.2 17.53,164.59 17.53,165.86 18.03,166.37 32.89,166.37 57.91,141.35 59.56,141.35 60.83,142.62 63.5,142.62 64.52,141.61 64.52,136.27 72.52,128.27 74.3,128.27 77.09,125.48 | 18.92,163.2 18.92,161.04 R-DEV-6.1
  Bottom 0.813: R-DEV-6.1 21.59,155.83 D-PWR2.A 7.75,155.83 3.94,152.02 3.94,148.08 5.08,146.94 IC6.2 11.18,146.94 C-PWR-5.- | C-PWR-6.2 12.95,145.67 C-PWR-5.- | ISP2.2 4.19,129.16 2.29,131.06 2.29,140.84 3.3,141.86 10.41,141.86 10.92,142.37 10.92,146.69 C-PWR-5.-
GND3
  Bottom 0.406: 173.99,122.81 174.12,122.94 | IC7.3 152.2,130.61 152.65,131.06 152.78,131.06 | 152.78,131.06 153.8,131.06 155.83,129.03 155.83,126.87 154.94,125.98 154.94,123.32 155.19,123.06 167.39,123.06 167.89,123.57 167.89,126.11 168.15,126.37 172.21,126.37 172.46,126.37 DIS4.1 | IC7.5 150.6,130.66 151.13,131.19 152.65,131.19 152.78,131.06 | IC7.21 151.4,139.94 150.5,140.84
  Bottom 0.61: DIS4.1 174.12,122.94 171.45,120.27 137.79,120.27 136.01,122.05 DIS4.16 | 150.5,140.84 148.34,140.84 131.19,157.99 131.19,158.37 125.48,164.08 114.05,164.08 | 114.05,164.08 112.65,165.48 112.65,166.75 113.16,167.26 128.02,167.26 153.03,142.24 154.69,142.24 155.96,143.51 158.62,143.51 159.64,142.49 159.64,137.16 167.64,129.16 169.42,129.16 172.21,126.37 | 114.05,164.08 114.05,161.93 R-DEV-8.1
  Bottom 0.813: R-DEV-8.1 116.71,156.72 D-PWR3.A 102.87,156.72 99.06,152.91 99.06,148.97 100.2,147.83 IC8.2 106.3,147.83 C-PWR-7.- | C-PWR-8.2 108.08,146.56 C-PWR-7.- | ISP3.2 99.31,130.05 97.41,131.95 97.41,141.73 98.43,142.75 105.54,142.75 106.04,143.26 106.04,147.57 C-PWR-7.-
GND4
  Bottom 0.406: 270.76,178.94 270.89,179.07 | IC9.3 248.98,186.75 249.43,187.2 249.56,187.2 | 249.56,187.2 250.57,187.2 252.6,185.17 252.6,183.01 251.71,182.12 251.71,179.45 251.97,179.2 264.16,179.2 264.67,179.71 264.67,182.25 264.92,182.5 268.99,182.5 269.23,182.5 DIS5.1 | IC9.5 247.38,186.8 247.9,187.33 249.43,187.33 249.56,187.2 | IC9.21 248.18,196.07 247.27,196.98
  Bottom 0.61: DIS5.1 270.89,179.07 268.22,176.4 234.57,176.4 232.79,178.19 DIS5.16 | 247.27,196.98 245.11,196.98 227.96,214.12 227.96,214.5 222.25,220.22 210.82,220.22 | 210.82,220.22 209.42,221.62 209.42,222.88 209.93,223.39 224.79,223.39 249.81,198.37 251.46,198.37 252.73,199.64 255.4,199.64 256.41,198.63 256.41,193.29 264.41,185.29 266.19,185.29 268.99,182.5 | 210.82,220.22 210.82,218.06 R-DEV-10.1
  Bottom 0.813: R-DEV-10.1 213.49,212.85 D-PWR4.A 199.64,212.85 195.83,209.04 195.83,205.11 196.98,203.96 IC10.2 203.07,203.96 C-PWR-9.- | C-PWR-10.2 204.85,202.69 C-PWR-9.- | ISP4.2 196.09,186.18 194.18,188.09 194.18,197.87 195.2,198.88 202.31,198.88 202.82,199.39 202.82,203.71 C-PWR-9.-
GND5
  Bottom 0.406: 365.25,178.69 365.38,178.82 | IC11.3 343.46,186.49 343.92,186.94 344.04,186.94 | 344.04,186.94 345.06,186.94 347.09,184.91 347.09,182.75 346.2,181.86 346.2,179.2 346.46,178.94 358.65,178.94 359.16,179.45 359.16,181.99 359.41,182.25 363.47,182.25 363.72,182.25 DIS6.1 | IC11.5 341.87,186.54 342.39,187.07 343.92,187.07 344.04,186.94 | IC11.21 342.67,195.81 341.76,196.72
  Bottom 0.61: DIS6.1 365.38,178.82 362.71,176.15 329.06,176.15 327.27,177.93 DIS6.16 | 341.76,196.72 339.6,196.72 322.45,213.87 322.45,214.25 316.74,219.96 305.31,219.96 | 305.31,219.96 303.91,221.36 303.91,222.63 304.42,223.14 319.28,223.14 344.3,198.12 345.95,198.12 347.22,199.39 349.88,199.39 350.9,198.37 350.9,193.04 358.9,185.04 360.68,185.04 363.47,182.25 | 305.31,219.96 305.31,217.81 R-DEV-12.1
  Bottom 0.813: R-DEV-12.1 307.98,212.6 D-PWR5.A 294.13,212.6 290.32,208.79 290.32,204.85 291.46,203.71 IC12.2 297.56,203.71 C-PWR-11.- | C-PWR-12.2 299.34,202.44 C-PWR-11.- | ISP5.2 290.58,185.93 288.67,187.83 288.67,197.61 289.69,198.63 296.8,198.63 297.31,199.14 297.31,203.45 C-PWR-11.-
GND6
  Bottom 0.406: 270.51,121.92 270.64,122.05 | IC13.3 248.72,129.72 249.17,130.18 249.3,130.18 | 249.3,130.18 250.32,130.18 252.35,128.14 252.35,125.98 251.46,125.1 251.46,122.43 251.71,122.17 263.91,122.17 264.41,122.68 264.41,125.22 264.67,125.48 268.73,125.48 268.98,125.48 DIS7.1 | IC13.5 247.12,129.78 247.65,130.3 249.17,130.3 249.3,130.18 | IC13.21 247.92,139.05 247.01,139.95
  Bottom 0.61: DIS7.1 270.64,122.05 267.97,119.38 234.31,119.38 232.53,121.16 DIS7.16 | 247.01,139.95 244.86,139.95 227.71,157.1 227.71,157.48 222,163.2 210.57,163.2 | 210.57,163.2 209.17,164.59 209.17,165.86 209.68,166.37 224.54,166.37 249.56,141.35 251.21,141.35 252.48,142.62 255.14,142.62 256.16,141.61 256.16,136.27 264.16,128.27 265.94,128.27 268.73,125.48 | 210.57,163.2 210.57,161.04 R-DEV-14.1
  Bottom 0.813: R-DEV-14.1 213.23,155.83 D-PWR6.A 199.39,155.83 195.58,152.02 195.58,148.08 196.72,146.94 IC14.2 202.82,146.94 C-PWR-13.- | C-PWR-14.2 204.6,145.67 C-PWR-13.- | ISP6.2 195.83,129.16 193.93,131.06 193.93,140.84 194.94,141.86 202.06,141.86 202.56,142.37 202.56,146.69 C-PWR-13.-
GND7
  Bottom 0.406: 365.63,122.81 365.76,122.94 | IC15.3 343.85,130.61 344.3,131.06 344.42,131.06 | 344.42,131.06 345.44,131.06 347.47,129.03 347.47,126.87 346.58,125.98 346.58,123.32 346.84,123.06 359.03,123.06 359.54,123.57 359.54,126.11 359.79,126.37 363.86,126.37 364.1,126.37 DIS8.1 | IC15.5 342.25,130.66 342.77,131.19 344.3,131.19 344.42,131.06 | IC15.21 343.05,139.94 342.14,140.84
  Bottom 0.61: DIS8.1 365.76,122.94 363.09,120.27 329.44,120.27 327.66,122.05 DIS8.16 | 342.14,140.84 339.98,140.84 322.83,157.99 322.83,158.37 317.12,164.08 305.69,164.08 | 305.69,164.08 304.29,165.48 304.29,166.75 304.8,167.26 319.66,167.26 344.68,142.24 346.33,142.24 347.6,143.51 350.27,143.51 351.28,142.49 351.28,137.16 359.28,129.16 361.06,129.16 363.86,126.37 | 305.69,164.08 305.69,161.93 R-DEV-16.1
  Bottom 0.813: R-DEV-16.1 308.36,156.72 D-PWR7.A 294.51,156.72 290.7,152.91 290.7,148.97 291.85,147.83 IC16.2 297.94,147.83 C-PWR-15.- | C-PWR-16.2 299.72,146.56 C-PWR-15.- | ISP7.2 290.96,130.05 289.05,131.95 289.05,141.73 290.07,142.75 297.18,142.75 297.69,143.26 297.69,147.57 C-PWR-15.-
GND8
  Bottom 0.406: 78.61,61.6 78.74,61.72 | IC17.3 56.83,69.4 57.28,69.85 57.4,69.85 | 57.4,69.85 58.42,69.85 60.45,67.82 60.45,65.66 59.56,64.77 59.56,62.1 59.82,61.85 72.01,61.85 72.52,62.36 72.52,64.9 72.77,65.15 76.84,65.15 77.08,65.15 DIS9.1 | IC17.5 55.23,69.45 55.75,69.98 57.28,69.98 57.4,69.85 | IC17.21 56.03,78.72 55.12,79.63
  Bottom 0.61: DIS9.1 78.74,61.72 76.07,59.06 42.42,59.06 40.64,60.84 DIS9.16 | 55.12,79.63 52.96,79.63 35.81,96.77 35.81,97.16 30.1,102.87 18.67,102.87 | 18.67,102.87 17.27,104.27 17.27,105.54 17.78,106.05 32.64,106.05 57.66,81.03 59.31,81.03 60.58,82.3 63.25,82.3 64.26,81.28 64.26,75.95 72.26,67.95 74.04,67.95 76.84,65.15 | 18.67,102.87 18.67,100.71 R-DEV-18.1
  Bottom 0.813: R-DEV-18.1 21.34,95.5 D-PWR8.A 7.49,95.5 3.68,91.69 3.68,87.76 4.83,86.61 IC18.2 10.92,86.61 C-PWR-17.- | C-PWR-18.2 12.7,85.34 C-PWR-17.- | ISP8.2 3.94,68.83 2.03,70.74 2.03,80.52 3.05,81.53 10.16,81.53 10.67,82.04 10.67,86.36 C-PWR-17.-
GND9
  Bottom 0.406: 173.1,61.34 173.23,61.47 | IC19.3 151.31,69.15 151.77,69.6 151.89,69.6 | 151.89,69.6 152.91,69.6 154.94,67.56 154.94,65.41 154.05,64.52 154.05,61.85 154.31,61.6 166.5,61.6 167,62.1 167,64.64 167.26,64.9 171.32,64.9 171.57,64.9 DIS10.1 | IC19.5 149.71,69.2 150.24,69.72 151.77,69.72 151.89,69.6 | IC19.21 150.51,78.47 149.61,79.38
  Bottom 0.61: DIS10.1 173.23,61.47 170.56,58.8 136.91,58.8 135.12,60.58 DIS10.16 | 149.61,79.38 147.45,79.38 130.3,96.52 130.3,96.9 124.59,102.62 113.16,102.62 | 113.16,102.62 111.76,104.01 111.76,105.28 112.27,105.79 127.13,105.79 152.15,80.77 153.8,80.77 155.07,82.04 157.73,82.04 158.75,81.03 158.75,75.69 166.75,67.69 168.53,67.69 171.32,64.9 | 113.16,102.62 113.16,100.46 R-DEV-20.1
  Bottom 0.813: R-DEV-20.1 115.82,95.25 D-PWR9.A 101.98,95.25 98.17,91.44 98.17,87.5 99.31,86.36 IC20.2 105.41,86.36 C-PWR-19.- | C-PWR-20.2 107.19,85.09 C-PWR-19.- | ISP9.2 98.43,68.58 96.52,70.49 96.52,80.26 97.54,81.28 104.65,81.28 105.16,81.79 105.16,86.11 C-PWR-19.-
GND10
  Bottom 0.406: 78.36,4.57 78.49,4.7 | IC21.3 56.57,12.38 57.02,12.83 57.15,12.83 | 57.15,12.83 58.17,12.83 60.2,10.8 60.2,8.64 59.31,7.75 59.31,5.08 59.56,4.83 71.75,4.83 72.26,5.33 72.26,7.87 72.52,8.13 76.58,8.13 76.83,8.13 DIS11.1 | IC21.5 54.97,12.43 55.5,12.95 57.02,12.95 57.15,12.83 | IC21.21 55.77,21.7 54.86,22.61
  Bottom 0.61: DIS11.1 78.49,4.7 75.82,2.03 42.16,2.03 40.38,3.81 DIS11.16 | 54.86,22.61 52.7,22.61 35.56,39.75 35.56,40.13 29.84,45.85 18.41,45.85 | 18.41,45.85 17.02,47.24 17.02,48.51 17.53,49.02 32.38,49.02 57.4,24 59.06,24 60.33,25.27 62.99,25.27 64.01,24.26 64.01,18.92 72.01,10.92 73.79,10.92 76.58,8.13 | 18.41,45.85 18.41,43.69 R-DEV-22.1
  Bottom 0.813: R-DEV-22.1 21.08,38.48 D-PWR10.A 7.24,38.48 3.43,34.67 3.43,30.73 4.57,29.59 IC22.2 10.67,29.59 C-PWR-21.- | C-PWR-22.2 12.45,28.32 C-PWR-21.- | ISP10.2 3.68,11.81 1.78,13.72 1.78,23.5 2.79,24.51 9.91,24.51 10.41,25.02 10.41,29.34 C-PWR-21.-
GND11
  Bottom 0.406: 173.48,5.46 173.61,5.59 | IC23.3 151.69,13.27 152.15,13.72 152.27,13.72 | 152.27,13.72 153.29,13.72 155.32,11.68 155.32,9.53 154.43,8.64 154.43,5.97 154.69,5.72 166.88,5.72 167.39,6.22 167.39,8.76 167.64,9.02 171.7,9.02 171.95,9.02 DIS12.1 | IC23.5 150.09,13.32 150.62,13.84 152.15,13.84 152.27,13.72 | IC23.21 150.9,22.59 149.99,23.5
  Bottom 0.61: DIS12.1 173.61,5.59 170.94,2.92 137.29,2.92 135.5,4.7 DIS12.16 | 149.99,23.5 147.83,23.5 130.68,40.64 130.68,41.02 124.97,46.74 113.54,46.74 | 113.54,46.74 112.14,48.13 112.14,49.4 112.65,49.91 127.51,49.91 152.53,24.89 154.18,24.89 155.45,26.16 158.12,26.16 159.13,25.15 159.13,19.81 167.13,11.81 168.91,11.81 171.7,9.02 | 113.54,46.74 113.54,44.58 R-DEV-24.1
  Bottom 0.813: R-DEV-24.1 116.21,39.37 D-PWR11.A 102.36,39.37 98.55,35.56 98.55,31.62 99.69,30.48 IC24.2 105.79,30.48 C-PWR-23.- | C-PWR-24.2 107.57,29.21 C-PWR-23.- | ISP11.2 98.81,12.7 96.9,14.61 96.9,24.38 97.92,25.4 105.03,25.4 105.54,25.91 105.54,30.23 C-PWR-23.-
GND12
  Bottom 0.406: 270.26,61.6 270.38,61.72 | IC25.3 248.47,69.4 248.92,69.85 249.05,69.85 | 249.05,69.85 250.06,69.85 252.1,67.82 252.1,65.66 251.21,64.77 251.21,62.1 251.46,61.85 263.65,61.85 264.16,62.36 264.16,64.9 264.41,65.15 268.48,65.15 268.72,65.15 DIS13.1 | IC25.5 246.87,69.45 247.4,69.98 248.92,69.98 249.05,69.85 | IC25.21 247.67,78.72 246.76,79.63
  Bottom 0.61: DIS13.1 270.38,61.72 267.72,59.06 234.06,59.06 232.28,60.84 DIS13.16 | 246.76,79.63 244.6,79.63 227.46,96.77 227.46,97.16 221.74,102.87 210.31,102.87 | 210.31,102.87 208.91,104.27 208.91,105.54 209.42,106.05 224.28,106.05 249.3,81.03 250.95,81.03 252.22,82.3 254.89,82.3 255.9,81.28 255.9,75.95 263.91,67.95 265.68,67.95 268.48,65.15 | 210.31,102.87 210.31,100.71 R-DEV-26.1
  Bottom 0.813: R-DEV-26.1 212.98,95.5 D-PWR12.A 199.14,95.5 195.33,91.69 195.33,87.76 196.47,86.61 IC26.2 202.56,86.61 C-PWR-25.- | C-PWR-26.2 204.34,85.34 C-PWR-25.- | ISP12.2 195.58,68.83 193.68,70.74 193.68,80.52 194.69,81.53 201.8,81.53 202.31,82.04 202.31,86.36 C-PWR-25.-
GND13
  Bottom 0.406: 364.74,61.34 364.87,61.47 | IC27.3 342.96,69.15 343.41,69.6 343.54,69.6 | 343.54,69.6 344.55,69.6 346.58,67.56 346.58,65.41 345.69,64.52 345.69,61.85 345.95,61.6 358.14,61.6 358.65,62.1 358.65,64.64 358.9,64.9 362.97,64.9 363.21,64.9 DIS14.1 | IC27.5 341.36,69.2 341.88,69.72 343.41,69.72 343.54,69.6 | IC27.21 342.16,78.47 341.25,79.38
  Bottom 0.61: DIS14.1 364.87,61.47 362.2,58.8 328.55,58.8 326.77,60.58 DIS14.16 | 341.25,79.38 339.09,79.38 321.94,96.52 321.94,96.9 316.23,102.62 304.8,102.62 | 304.8,102.62 303.4,104.01 303.4,105.28 303.91,105.79 318.77,105.79 343.79,80.77 345.44,80.77 346.71,82.04 349.38,82.04 350.39,81.03 350.39,75.69 358.39,67.69 360.17,67.69 362.97,64.9 | 304.8,102.62 304.8,100.46 R-DEV-28.1
  Bottom 0.813: R-DEV-28.1 307.47,95.25 D-PWR13.A 293.62,95.25 289.81,91.44 289.81,87.5 290.96,86.36 IC28.2 297.05,86.36 C-PWR-27.- | C-PWR-28.2 298.83,85.09 C-PWR-27.- | ISP13.2 290.07,68.58 288.16,70.49 288.16,80.26 289.18,81.28 296.29,81.28 296.8,81.79 296.8,86.11 C-PWR-27.-
GND14
  Bottom 0.406: 270,4.57 270.13,4.7 | IC29.3 248.21,12.38 248.67,12.83 248.79,12.83 | 248.79,12.83 249.81,12.83 251.84,10.8 251.84,8.64 250.95,7.75 250.95,5.08 251.21,4.83 263.4,4.83 263.91,5.33 263.91,7.87 264.16,8.13 268.22,8.13 268.47,8.13 DIS15.1 | IC29.5 246.62,12.43 247.14,12.95 248.67,12.95 248.79,12.83 | IC29.21 247.42,21.7 246.51,22.61
  Bottom 0.61: DIS15.1 270.13,4.7 267.46,2.03 233.81,2.03 232.02,3.81 DIS15.16 | 246.51,22.61 244.35,22.61 227.2,39.75 227.2,40.13 221.49,45.85 210.06,45.85 | 210.06,45.85 208.66,47.24 208.66,48.51 209.17,49.02 224.03,49.02 249.05,24 250.7,24 251.97,25.27 254.63,25.27 255.65,24.26 255.65,18.92 263.65,10.92 265.43,10.92 268.22,8.13 | 210.06,45.85 210.06,43.69 R-DEV-30.1
  Bottom 0.813: R-DEV-30.1 212.72,38.48 D-PWR14.A 198.88,38.48 195.07,34.67 195.07,30.73 196.22,29.59 IC30.2 202.31,29.59 C-PWR-29.- | C-PWR-30.2 204.09,28.32 C-PWR-29.- | ISP14.2 195.33,11.81 193.42,13.72 193.42,23.5 194.44,24.51 201.55,24.51 202.06,25.02 202.06,29.34 C-PWR-29.-
GND15
  Bottom 0.406: 365.12,5.46 365.25,5.59 | IC31.3 343.34,13.27 343.79,13.72 343.92,13.72 | 343.92,13.72 344.93,13.72 346.96,11.68 346.96,9.53 346.07,8.64 346.07,5.97 346.33,5.72 358.52,5.72 359.03,6.22 359.03,8.76 359.28,9.02 363.35,9.02 363.59,9.02 DIS16.1 | IC31.5 341.74,13.32 342.26,13.84 343.79,13.84 343.92,13.72 | IC31.21 342.54,22.59 341.63,23.5
  Bottom 0.61: DIS16.1 365.25,5.59 362.58,2.92 328.93,2.92 327.15,4.7 DIS16.16 | 341.63,23.5 339.47,23.5 322.33,40.64 322.33,41.02 316.61,46.74 305.18,46.74 | 305.18,46.74 303.78,48.13 303.78,49.4 304.29,49.91 319.15,49.91 344.17,24.89 345.82,24.89 347.09,26.16 349.76,26.16 350.77,25.15 350.77,19.81 358.77,11.81 360.55,11.81 363.35,9.02 | 305.18,46.74 305.18,44.58 R-DEV-32.1
  Bottom 0.813: R-DEV-32.1 307.85,39.37 D-PWR15.A 294,39.37 290.19,35.56 290.19,31.62 291.34,30.48 IC32.2 297.43,30.48 C-PWR-31.- | C-PWR-32.2 299.21,29.21 C-PWR-31.- | ISP15.2 290.45,12.7 288.54,14.61 288.54,24.38 289.56,25.4 296.67,25.4 297.18,25.91 297.18,30.23 C-PWR-31.-
IN
  Bottom 0.406: IC1.23 58.13,195.99 57.15,196.98
  Bottom 0.61: 57.15,196.98 32.26,221.87 23.24,221.87 R-DEV-2.2 R-DEV-1.1
IN1
  Bottom 0.406: IC3.23 152.62,195.74 151.64,196.72
  Bottom 0.61: 151.64,196.72 126.75,221.62 117.73,221.62 R-DEV-4.2 R-DEV-3.1
IN2
  Bottom 0.406: IC5.23 57.88,138.97 56.9,139.95
  Bottom 0.61: 56.9,139.95 32,164.85 22.99,164.85 R-DEV-6.2 R-DEV-5.1
IN3
  Bottom 0.406: IC7.23 153,139.86 152.02,140.84
  Bottom 0.61: 152.02,140.84 127.13,165.74 118.11,165.74 R-DEV-8.2 R-DEV-7.1
IN4
  Bottom 0.406: IC9.23 249.78,195.99 248.79,196.98
  Bottom 0.61: 248.79,196.98 223.9,221.87 214.88,221.87 R-DEV-10.2 R-DEV-9.1
IN5
  Bottom 0.406: IC11.23 344.26,195.74 343.28,196.72
  Bottom 0.61: 343.28,196.72 318.39,221.62 309.37,221.62 R-DEV-12.2 R-DEV-11.1
IN6
  Bottom 0.406: IC13.23 249.52,138.97 248.54,139.95
  Bottom 0.61: 248.54,139.95 223.65,164.85 214.63,164.85 R-DEV-14.2 R-DEV-13.1
IN7
  Bottom 0.406: IC15.23 344.65,139.86 343.66,140.84
  Bottom 0.61: 343.66,140.84 318.77,165.74 309.75,165.74 R-DEV-16.2 R-DEV-15.1
IN8
  Bottom 0.406: IC17.23 57.63,78.65 56.64,79.63
  Bottom 0.61: 56.64,79.63 31.75,104.52 22.73,104.52 R-DEV-18.2 R-DEV-17.1
IN9
  Bottom 0.406: IC19.23 152.11,78.39 151.13,79.38
  Bottom 0.61: 151.13,79.38 126.24,104.27 117.22,104.27 R-DEV-20.2 R-DEV-19.1
IN10
  Bottom 0.406: IC21.23 57.37,21.62 56.39,22.61
  Bottom 0.61: 56.39,22.61 31.5,47.5 22.48,47.5 R-DEV-22.2 R-DEV-21.1
IN11
  Bottom 0.406: IC23.23 152.5,22.51 151.51,23.5
  Bottom 0.61: 151.51,23.5 126.62,48.39 117.6,48.39 R-DEV-24.2 R-DEV-23.1
IN12
  Bottom 0.406: IC25.23 249.27,78.65 248.29,79.63
  Bottom 0.61: 248.29,79.63 223.39,104.52 214.38,104.52 R-DEV-26.2 R-DEV-25.1
IN13
  Bottom 0.406: IC27.23 343.76,78.39 342.77,79.38
  Bottom 0.61: 342.77,79.38 317.88,104.27 308.86,104.27 R-DEV-28.2 R-DEV-27.1
IN14
  Bottom 0.406: IC29.23 249.01,21.62 248.03,22.61
  Bottom 0.61: 248.03,22.61 223.14,47.5 214.12,47.5 R-DEV-30.2 R-DEV-29.1
IN15
  Bottom 0.406: IC31.23 344.14,22.51 343.15,23.5
  Bottom 0.61: 343.15,23.5 318.26,48.39 309.25,48.39 R-DEV-32.2 R-DEV-31.1
N$1
  pour Bottom (isolate 0.61): 1.02,225.81 82.93,225.81 82.93,174.37 1.02,174.37 1.02,225.68
N$2
  Bottom 0.406: IC3.17 147.82,195.21 147.45,195.58 145.03,195.58 145.03,194.31 144.27,193.55 104.65,193.55
  Bottom 0.61: 104.65,193.55 104.65,194.31 102.87,196.09 ISP1.6
N$3
  Bottom 0.406: IC3.16 103.63,192.54
  Bottom 0.61: 103.63,192.54 102.62,193.55 ISP1.5
N$4
  Bottom 0.406: IC3.15 103.98,191.74
  Bottom 0.61: 103.98,191.74 103.09,191.74 102.36,191.01 ISP1.4
N$5
  pour Bottom (isolate 0.61): 95.5,225.55 177.42,225.55 177.42,174.12 95.5,174.12 95.5,225.43
N$6
  Bottom 0.406: IC5.17 53.08,138.44 52.7,138.81 50.29,138.81 50.29,137.54 49.53,136.78 9.91,136.78
  Bottom 0.61: 9.91,136.78 9.91,137.54 8.13,139.32 ISP2.6
N$7
  Bottom 0.406: IC5.16 8.88,135.77
  Bottom 0.61: 8.88,135.77 7.87,136.78 ISP2.5
N$8
  Bottom 0.406: IC5.15 9.24,134.97
  Bottom 0.61: 9.24,134.97 8.35,134.97 7.62,134.24 ISP2.4
N$9
  pour Bottom (isolate 0.61): 0.76,168.78 82.68,168.78 82.68,117.35 0.76,117.35 0.76,168.66
N$10
  Bottom 0.406: IC7.17 148.2,139.33 147.83,139.7 145.41,139.7 145.41,138.43 144.65,137.67 105.03,137.67
  Bottom 0.61: 105.03,137.67 105.03,138.43 103.25,140.21 ISP3.6
N$11
  Bottom 0.406: IC7.16 104.01,136.66
  Bottom 0.61: 104.01,136.66 103,137.67 ISP3.5
N$12
  Bottom 0.406: IC7.15 104.36,135.86
  Bottom 0.61: 104.36,135.86 103.47,135.86 102.74,135.13 ISP3.4
N$13
  pour Bottom (isolate 0.61): 95.89,169.67 177.8,169.67 177.8,118.24 95.89,118.24 95.89,169.55
N$14
  Bottom 0.406: IC9.17 244.98,195.46 244.6,195.83 242.19,195.83 242.19,194.56 241.43,193.8 201.8,193.8
  Bottom 0.61: 201.8,193.8 201.8,194.56 200.03,196.34 ISP4.6
N$15
  Bottom 0.406: IC1.17 53.33,195.46 52.96,195.83 50.55,195.83 50.55,194.56 49.78,193.8 10.16,193.8
  Bottom 0.61: 10.16,193.8 10.16,194.56 8.38,196.34 ISP.6
N$16
  Bottom 0.406: IC1.16 9.14,192.79
  Bottom 0.61: 9.14,192.79 8.13,193.8 ISP.5
N$17
  Bottom 0.406: IC1.15 9.49,191.99
  Bottom 0.61: 9.49,191.99 8.6,191.99 7.87,191.26 ISP.4
N$18
  Bottom 0.406: IC9.16 200.78,192.79
  Bottom 0.61: 200.78,192.79 199.77,193.8 ISP4.5
N$19
  Bottom 0.406: IC9.15 201.14,191.99
  Bottom 0.61: 201.14,191.99 200.25,191.99 199.52,191.26 ISP4.4
N$20
  pour Bottom (isolate 0.61): 192.66,225.81 274.57,225.81 274.57,174.37 192.66,174.37 192.66,225.68
N$21
  Bottom 0.406: IC11.17 339.46,195.21 339.09,195.58 336.68,195.58 336.68,194.31 335.92,193.55 296.29,193.55
  Bottom 0.61: 296.29,193.55 296.29,194.31 294.51,196.09 ISP5.6
N$22
  Bottom 0.406: IC11.16 295.27,192.54
  Bottom 0.61: 295.27,192.54 294.26,193.55 ISP5.5
N$23
  Bottom 0.406: IC11.15 295.62,191.74
  Bottom 0.61: 295.62,191.74 294.74,191.74 294,191.01 ISP5.4
N$24
  pour Bottom (isolate 0.61): 287.15,225.55 369.06,225.55 369.06,174.12 287.15,174.12 287.15,225.43
N$25
  Bottom 0.406: IC13.17 244.72,138.44 244.35,138.81 241.94,138.81 241.94,137.54 241.17,136.78 201.55,136.78
  Bottom 0.61: 201.55,136.78 201.55,137.54 199.77,139.32 ISP6.6
N$26
  Bottom 0.406: IC13.16 200.53,135.77
  Bottom 0.61: 200.53,135.77 199.52,136.78 ISP6.5
N$27
  Bottom 0.406: IC13.15 200.88,134.97
  Bottom 0.61: 200.88,134.97 199.99,134.97 199.26,134.24 ISP6.4
N$28
  pour Bottom (isolate 0.61): 192.41,168.78 274.32,168.78 274.32,117.35 192.41,117.35 192.41,168.66
N$29
  Bottom 0.406: IC15.17 339.85,139.33 339.47,139.7 337.06,139.7 337.06,138.43 336.3,137.67 296.67,137.67
  Bottom 0.61: 296.67,137.67 296.67,138.43 294.89,140.21 ISP7.6
N$30
  Bottom 0.406: IC15.16 295.65,136.66
  Bottom 0.61: 295.65,136.66 294.64,137.67 ISP7.5
N$31
  Bottom 0.406: IC15.15 296,135.86
  Bottom 0.61: 296,135.86 295.12,135.86 294.39,135.13 ISP7.4
N$32
  pour Bottom (isolate 0.61): 287.53,169.67 369.44,169.67 369.44,118.24 287.53,118.24 287.53,169.55
N$33
  Bottom 0.406: IC17.17 52.83,78.11 52.45,78.49 50.04,78.49 50.04,77.22 49.28,76.45 9.65,76.45
  Bottom 0.61: 9.65,76.45 9.65,77.22 7.87,78.99 ISP8.6
N$34
  Bottom 0.406: IC17.16 8.63,75.44
  Bottom 0.61: 8.63,75.44 7.62,76.45 ISP8.5
N$35